# Altium PCB PCB1.PcbDoc (part 1 of 2)
Units mm, origin at the board's own origin, x right, y up, seen from the top; angles counter-clockwise.
Board outline 19 x 71.98 mm, 2 copper layers (Top Layer, Bottom Layer), stack 0.792 mm thick; 87 components, 51 nets, 279 pads, 160 vias.
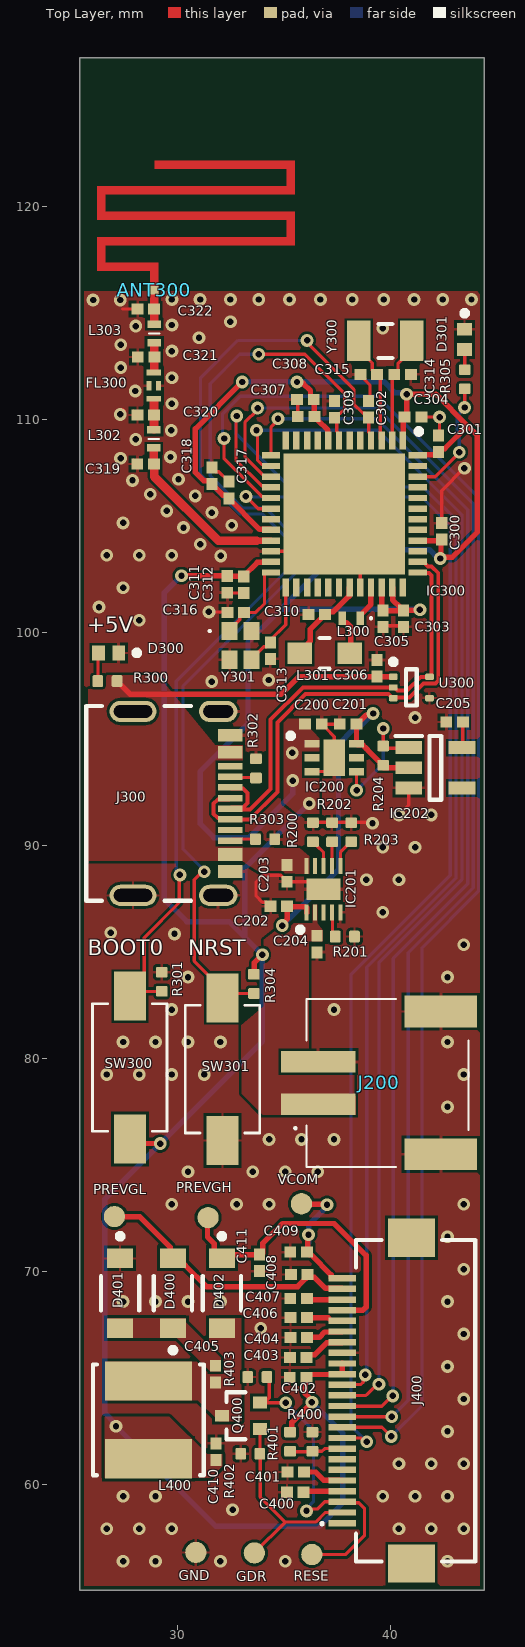
[diagram p0: Top Layer view]
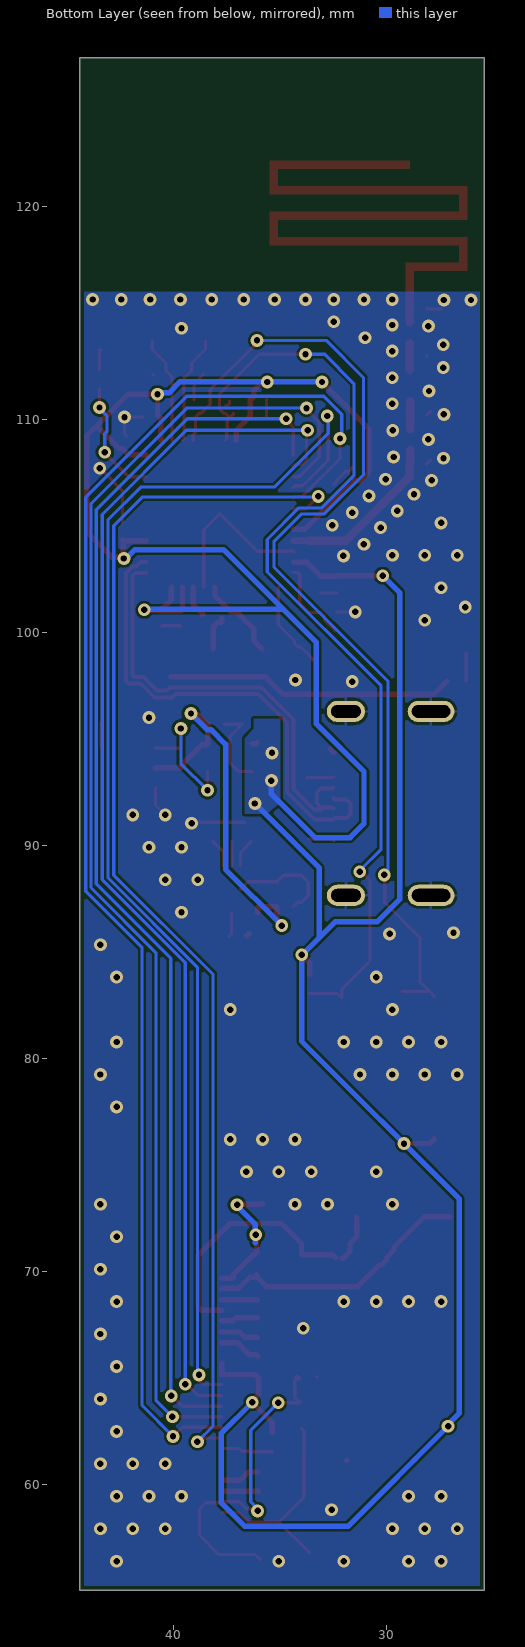
[diagram p1: Bottom Layer view, seen from below]
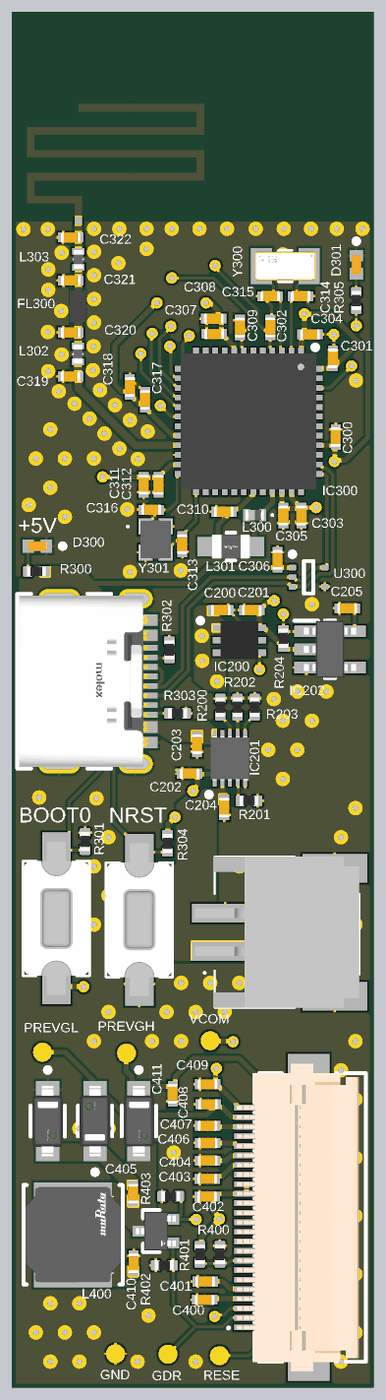
[diagram p2: 3D render of the assembled board from above, using the file's embedded part models]

## Layer stack, top to bottom
Top Solder: solder mask 0.0178, Solder Resist, Dk 4.4
Top Layer: signal copper 0.0406
Dielectric 1: dielectric 0.7112, FR-4, Dk 4.4
Bottom Layer: signal copper 0.0406
Bottom Solder: solder mask 0.0178, Solder Resist, Dk 4.4

## Board outline
25.4,55.025 25.4,127 44.4,127 44.4,116 44.4,55.025 44.375,55.025

## Design rules (kind name [scope] priority, off if disabled: settings)
BoardOutlineClearance [All] p1: gap=0.2 ignorepadtopadclearanceinfootprint=FALSE
Clearance "Stitching GND" [IsStitchingVia and InNet('GND') vs OnLayer('Top Solder')] p1: gap=0.127 ignorepadtopadclearanceinfootprint=FALSE
Clearance [All] p2: gap=0.127 ignorepadtopadclearanceinfootprint=TRUE
ComponentClearance [All] p1: gap=0.127 collisioncheckmode=3 verticalgap=0.127 showdistances=TRUE
DiffPairsRouting [All] p1: maxlimit=0.127 minlimit=0.127 mostfreqgap=0.127 toplayer_minwidth=0.187 toplayer_maxwidth=0.187 toplayer_prefwidth=0.187 bottomlayer_minwidth=0.187 bottomlayer_maxwidth=0.187 bottomlayer_prefwidth=0.187 impedanceprofiledriven=TRUE impedanceprofileid={A50F6D99-8F6A-45D2-AA71-C701F7DE1C7E} impedanceprofilevalue=90.000000 maxuncoupledlength=12.7
Height [All] p1: minheight=0 maxheight=1816.048 prefheight=12.7
HoleSize [All] p1: absolutevalues=TRUE maxlimit=6.3 minlimit=0.3 maxpercent=80.000 minpercent=20.000
HoleToHoleClearance [All] p1: gap=0.25 allowstackedmicrovias=FALSE
MinimumAnnularRing [All] p1: minimumring=0.076
MinimumSolderMaskSliver [All] p1: minsoldermaskwidth=0
PlaneClearance [All] p1: clearance=0.127
PlaneConnect PlaneConnectPOWER [InNetClass('POWER')] p1: planeconnectstyle=Direct reliefexpansion=0.3 reliefentries=4 reliefconductorwidth=0.127 reliefairgap=0.127
PlaneConnect [All] p2: pad.planeconnectstyle=Relief pad.reliefexpansion=0.3 pad.reliefentries=4 pad.reliefconductorwidth=0.127 pad.reliefairgap=0.127 via.planeconnectstyle=Direct via.reliefexpansion=0.3 via.reliefentries=4 via.reliefconductorwidth=0.127 via.reliefairgap=0.127
PolygonConnect PolygonConnectNetClassPower [InNetClass('POWER')] p1: thpad.connectstyle=Relief thpad.reliefconductorwidth=0.127 thpad.reliefentries=4 thpad.polygonreliefangle="90 Angle" thpad.airgapwidth=0.127 smdpad.connectstyle=Direct smdpad.reliefconductorwidth=0.127 smdpad.reliefentries=4 smdpad.polygonreliefangle="90 Angle" smdpad.airgapwidth=0.127 via.connectstyle=Direct via.reliefconductorwidth=0.127 via.reliefentries=4 via.polygonreliefangle="90 Angle" via.airgapwidth=0.127
PolygonConnect PolygonConnectBoost1 [InNet('NetC405_2')] p2: connectstyle=Direct reliefconductorwidth=0.254 reliefentries=4 polygonreliefangle="90 Angle" airgapwidth=0.254
PolygonConnect PolygonConnectBoost2 [InNet('NetC405_1')] p3: connectstyle=Direct reliefconductorwidth=0.254 reliefentries=4 polygonreliefangle="90 Angle" airgapwidth=0.254
PolygonConnect [All] p4: thpad.connectstyle=Relief thpad.reliefconductorwidth=0.127 thpad.reliefentries=4 thpad.polygonreliefangle="90 Angle" thpad.airgapwidth=0.127 smdpad.connectstyle=Relief smdpad.reliefconductorwidth=0.127 smdpad.reliefentries=4 smdpad.polygonreliefangle="90 Angle" smdpad.airgapwidth=0.127 via.connectstyle=Direct via.reliefconductorwidth=0.127 via.reliefentries=4 via.polygonreliefangle="90 Angle" via.airgapwidth=0.127
RoutingVias [All] p1: holewidth=0.3 width=0.6 viastyle="Through Hole" minholewidth=0.3 minwidth=0.6 maxholewidth=0.6 maxwidth=6.6
SilkToSilkClearance [All] p1: silktosilkclearance=0
SilkToSolderMaskClearance [IsPad] p1: minsilkscreentomaskgap=0.127 clearancetoexposedcopper=TRUE
SolderMaskExpansion [All] p1: expansion=0.075 istentingtop=FALSE
SupplyNets "Schematic Supply Nets_2" [InNet('+5V')] p1: voltage=0.000
SupplyNets "Schematic Supply Nets_1" [InNet('+3V3')] p2: voltage=0.000
SupplyNets "Schematic Supply Nets" [InNet('GND')] p3: voltage=0.000
Width [All] p1: maxlimit=0.762 minlimit=0.127 preferedwidth=0.152 minimp=50.000000 maximp=50.000000 favimp=50.000000
20 further rules are at their usual default settings.

## Classes and differential pairs
net class POWER: +3V3 +5V BAT+
component class POWER: 3 C200 C201 C202 C203 C204 C205 IC200 IC201 IC202 J200 R200 R201 R202 R203 R204
component class MCU: ANT300 C300 C301 C302 C303 C304 C305 C306 C307 C308 C309 C310 C311 C312 C313 C314 C315 C316 C317 C318 C319 C320 C321 C322 D300 D301 FL300 IC300 J300 L300 L301 L302 L303 R300 R301 R302 R303 R304 R305 SW300 SW301 U300 Y300 Y301
component class DISPLAY: C400 C401 C402 C403 C404 C405 C406 C407 C408 C409 C410 C411 D400 D401 D402 GDR GND J400 L400 PREVGH PREVGL Q400 R400 R401 R402 R403 RESE VCOM
differential pair USB_D: +USB_D_P -USB_D_N

## Components (designator, comment, footprint, x,y, rotation, side; value= is the part's Value field where it differs from the comment)
ANT300 "MEANDER_ANTENNA" MEANDER_ANTENNA 28.7,115.875 r0 top locked
C200 "Capacitor 1 uF +/- 10% 6.3 V 0402" CAPC1005X55X25LL05T10 36.375,95.7 r180 top value=1uF
C201 "Capacitor 1 uF +/- 10% 6.3 V 0402" CAPC1005X55X25LL05T10 38,95.7 r0 top value=1uF
C202 "Capacitor 1 uF +/- 10% 6.3 V 0402" CAPC1005X55X25LL05T10 34.74,87.15 r0 top value=10uF
C203 "Capacitor 1 uF +/- 10% 6.3 V 0402" CAPC1005X55X25LL05T10 35.125,88.69 r90 top value=1uF
C204 "Capacitor 1 uF +/- 10% 6.3 V 0402" CAPC1005X55X25LL05T10 36.55,85.375 r90 top value=1uF
C205 "Capacitor 1 uF +/- 10% 6.3 V 0402" CAPC1005X55X25LL05T10 43,95.8 r0 top value=10nF
C300 "Capacitor 1 uF +/- 10% 6.3 V 0402" CAPC1005X55X25LL05T10 42.4,104.76 r270 top value=100nF
C301 "Capacitor 1 uF +/- 10% 6.3 V 0402" CAPC1005X55X25LL05T10 42.25,108.875 r270 top value=100nF
C302 "Capacitor 1 uF +/- 10% 6.3 V 0402" CAPC1005X55X25LL05T10 38.967,110.494 r270 top value=100nF
C303 "Capacitor 1 uF +/- 10% 6.3 V 0402" CAPC1005X55X25LL05T10 40.6,100.65 r90 top value=100nF
C304 "Capacitor 1 uF +/- 10% 6.3 V 0402" CAPC1005X55X25LL05T10 41.05,110.125 r180 top value=100nF
C305 "Capacitor 1 uF +/- 10% 6.3 V 0402" CAPC1005X55X25LL05T10 39.65,100.65 r90 top value=4.7uF
C306 "Capacitor 1 uF +/- 10% 6.3 V 0402" CAPC1005X55X25LL05T10 39.35,98.335 r270 top value=100nF
C307 "Capacitor 1 uF +/- 10% 6.3 V 0402" CAPC1005X55X25LL05T10 36.025,110.15 r0 top value=1uF
C308 "Capacitor 1 uF +/- 10% 6.3 V 0402" CAPC1005X55X25LL05T10 36,110.95 r0 top value=10nF
C309 "Capacitor 1 uF +/- 10% 6.3 V 0402" CAPC1005X55X25LL05T10 37.372,110.484 r270 top value=100nF
C310 "Capacitor 1 uF +/- 10% 6.3 V 0402" CAPC1005X55X25LL05T10 36.525,100.85 r0 top value=4.7uF
C311 "Capacitor 1 uF +/- 10% 6.3 V 0402" CAPC1005X55X25LL05T10 32.325,102.265 r90 top value=100pF
C312 "Capacitor 1 uF +/- 10% 6.3 V 0402" CAPC1005X55X25LL05T10 33.1,102.255 r90 top value=100nF
C313 "Capacitor 1 uF +/- 10% 6.3 V 0402" CAPC1005X55X25LL05T10 34.35,99.15 r90 top value=10pF
C314 "Capacitor 1 uF +/- 10% 6.3 V 0402" CAPC1005X55X25LL05T10 40.56,112.125 r180 top value=18pF
C315 "Capacitor 1 uF +/- 10% 6.3 V 0402" CAPC1005X55X25LL05T10 38.965,112.125 r0 top value=18pF
C316 "Capacitor 1 uF +/- 10% 6.3 V 0402" CAPC1005X55X25LL05T10 32.725,100.95 r0 top value=10pF
C317 "Capacitor 1 uF +/- 10% 6.3 V 0402" CAPC1005X55X25LL05T10 32.4,106.7 r270 top value=100nF
C318 "Capacitor 1 uF +/- 10% 6.3 V 0402" CAPC1005X55X25LL05T10 31.6,107.375 r270 top value=4.7uF
C319 "Capacitor 1 uF +/- 10% 6.3 V 0402" CAPC1005X55X25LL05T10 28.49,107.925 r0 top value=0.8pF
C320 "Capacitor 1 uF +/- 10% 6.3 V 0402" CAPC1005X55X25LL05T10 28.5,110.225 r0 top value=0.3pF
C321 "Capacitor 1 uF +/- 10% 6.3 V 0402" CAPC1005X55X25LL05T10 28.51,112.95 r0 top value=DNP/TBD
C322 "Capacitor 1 uF +/- 10% 6.3 V 0402" CAPC1005X55X25LL05T10 28.5,115.2 r0 top value=DNP/TBD
C400 "Capacitor 1 uF +/- 10% 6.3 V 0402" CAPC1005X55X25LL05T10 35.525,59.625 r180 top value=4.7uF/25V
C401 "Capacitor 1 uF +/- 10% 6.3 V 0402" CAPC1005X55X25LL05T10 35.55,60.575 r180 top value=4.7uF/25V
C402 "Capacitor 1 uF +/- 10% 6.3 V 0402" CAPC1005X55X25LL05T10 35.65,65.025 r0 top value=1uF/50V
C403 "Capacitor 1 uF +/- 10% 6.3 V 0402" CAPC1005X55X25LL05T10 35.66,65.95 r0 top value=1uF/50V
C404 "Capacitor 1 uF +/- 10% 6.3 V 0402" CAPC1005X55X25LL05T10 35.685,66.9 r0 top value=1uF/50V
C405 "Capacitor 1 uF +/- 10% 6.3 V 0402" CAPC1005X55X25LL05T10 31.772,65.176 r90 top value=4.7uF/25V
C406 "Capacitor 1 uF +/- 10% 6.3 V 0402" CAPC1005X55X25LL05T10 35.685,67.825 r0 top value=4.7uF/25V
C407 "Capacitor 1 uF +/- 10% 6.3 V 0402" CAPC1005X55X25LL05T10 35.675,68.725 r0 top value=4.7uF/25V
C408 "Capacitor 1 uF +/- 10% 6.3 V 0402" CAPC1005X55X25LL05T10 35.7,69.85 r0 top value=4.7uF/25V
C409 "Capacitor 1 uF +/- 10% 6.3 V 0402" CAPC1005X55X25LL05T10 35.675,70.9 r0 top value=1uF/50V
C410 "Capacitor 1 uF +/- 10% 6.3 V 0402" CAPC1005X55X25LL05T10 31.804,61.533 r270 top value=4.7uF/25V
C411 "Capacitor 1 uF +/- 10% 6.3 V 0402" CAPC1005X55X25LL05T10 33.85,70.4 r90 top value=4.7uF/25V
D300 "LED" FP-VLMO1500-GS08-MFG 26.75,99.05 r180 top
D301 "LED" FP-VLMO1500-GS08-MFG 43.475,113.775 r270 top
D400 "MBR0530" FP-425-04-MFG 29.775,68.975 r90 top
D401 "MBR0530" FP-425-04-MFG 27.293,68.971 r270 top
D402 "MBR0530" FP-425-04-MFG 32.075,68.975 r270 top
FL300 "DLF162500LT-5028A1" DLF162500LT5028A1 28.873,111.6 r90 top
GDR "TPAD10R" TEST_POINT 33.6,56.775 r90 top
GND "TPAD10R" TEST_POINT 30.85,56.8 r90 top
IC200 "TPS74533PQWDRVRQ1" SON65P200X200X80-7N 37.35,94.125 r0 top
IC201 "BQ25185DLHR" SON40P220X200X80-11N 36.85,87.95 r90 top
IC202 "NCV303LSN34T1G" SOT95P275X110-5N 42.1,93.65 r0 top
IC300 "STM32WB35CCU6AXXX" QFN50P700X700X65-49N-D 37.825,105.575 r270 top
J200 "S2B-PH-SM4-TB_LF__SN_" S2BPHSM4TBLFSN 39.85,78.85 r270 top locked
J300 "217179-0001" FP-2171790001-MFG 29.05,91.98 r270 top locked
J400 "FH12-24S-0.5SH_55_" FH12-24S-0.5SH(55) 38.375,63.925 r90 top locked
L300 "10nH" FP-LQG15WH_02-MFG 38.15,100.675 r180 top
L301 "10uH" FP-LQM21FN_70-MFG 36.898,99.027 r180 top
L302 "2.7nH" LQG15WH0N7B02D 28.875,109.1 r90 top
L303 "DNP/TBD" LQG15WH0N7B02D 28.9,114.05 r90 top
L400 "10uH/1.2A" FP-LQH5BPB_T0-MFG 28.625,63.025 r90 top
PREVGH "TPAD10R" TEST_POINT 31.425,72.525 r90 top (schematic designator PREVGH400)
PREVGL "TPAD10R" TEST_POINT 27.025,72.575 r90 top (schematic designator PREVGL400)
Q400 "SI1308EDL" FP-5549-MFG 32.968,63.216 r180 top
R200 "100R2F" RESC0402(1005)_L 36.35,90.625 r270 top value=600Ω
R201 "100R2F" RESC0402(1005)_L 37.85,85.725 r180 top value=10kΩ
R202 "100R2F" RESC0402(1005)_L 37.25,90.625 r270 top value=13kΩ
R203 "100R2F" RESC0402(1005)_L 38.15,90.625 r270 top value=10kΩ
R204 "100R2F" RESC0402(1005)_L 39.65,94.225 r90 top value=470kΩ
R300 "100R2F" RESC0402(1005)_L 26.7,97.725 r0 top value=500Ω
R301 "100R2F" RESC0402(1005)_L 29.25,83.6 r90 top value=10kΩ
R302 "100R2F" RESC0402(1005)_L 33.675,93.625 r90 top value=5.1kΩ
R303 "100R2F" RESC0402(1005)_L 34.1,90.3 r0 top value=5.1kΩ
R304 "100R2F" RESC0402(1005)_L 33.575,83.5 r270 top value=10kΩ
R305 "100R2F" RESC0402(1005)_L 43.475,111.9 r90 top value=330Ω
R400 "100R2F" RESC0402(1005)_L 36.325,62 r270 top value=3Ω
R401 "100R2F" RESC0402(1005)_L 35.275,62 r270 top value=10kΩ
R402 "100R2F" RESC0402(1005)_L 33.41,61.431 r180 top value=10kΩ
R403 "100R2F" RESC0402(1005)_L 33.738,65.038 r180 top value=0.47Ω
RESE "TPAD10R" TEST_POINT 36.3,56.7 r90 top
SW300 "434111050826" 434111050826 27.75,79.575 r90 top
SW301 "434111050826" 434111050826 32.1,79.5 r90 top
U300 "TPD2E001DRLR" DRL0005A_L 40.975,97.425 r0 top
VCOM "TPAD10R" TEST_POINT 35.813,73.175 r90 top
Y300 "ECS-.327-12.5-34B-TR" FP-ECX-31B-MFG 39.75,113.7 r180 top
Y301 "ECS-320-8-37B-CKY-TR" ECS320837BCKYTR 32.95,99.4 r270 top

## Footprints (in the part's own frame and the unit in brackets; to place one, negate y for a bottom-side part, rotate by r counter-clockwise, add the part's x,y. Pads: shape width x height; smd on the part's side, far side on the other; paste and mask are expansions set on the pad)
434111050826 [mm] "SMD Tact Switch, body 6x3.5mm"
  rect 2.3x1.5 smd: 1(-3.35,0) 2(3.35,0)
  silkscreen extent -3,-1.75 3,1.75, body extent -4,-1.75 4,1.75, height 5
CAPC1005X55X25LL05T10 [mm] "Chip Capacitor, 2-Leads, Body 1.05x0.55mm, IPC High Density"
  rect 0.56x0.52 smd: 1(-0.39,0) 2(0.39,0)
  body extent -0.53,-0.28 0.53,0.28, height 0.55
DLF162500LT5028A1 [mm]
  rect 0.275x0.7 smd: 1(-0.612,0) 3(0.613,0)
  rect 0.45x0.245 smd: 2(0,-0.227) 4(0,0.227)
  body extent -0.83,-0.42 0.83,0.42, height 0.26
DRL0005A_L [mm] "SOT23, 5-Leads, Body 1.7x1.3mm, Pitch 0.5mm, IPC High Density"
  rrect33% 0.4x0.3 smd: 1(-0.85,0.5) 2(-0.85,0) 3(-0.85,-0.5) 4(0.85,-0.5) 5(0.85,0.5)
  silkscreen extent -0.97,-0.85 0.25,1.32, body extent -0.65,-0.85 0.65,0.85, height 0.6
ECS320837BCKYTR [mm]
  rect 0.85x0.75 smd: 1(-0.675,-0.525) 2(0.675,-0.525) 3(0.675,0.525) 4(-0.675,0.525)
  silkscreen extent -0.72,-1.5 -0.63,-1.4, body extent -1.02,-0.82 1.02,0.82, height 0.6
FH12-24S-0.5SH(55) [mm]
  rect 0.3x1.3 smd: 1(-5.75,0.65) 2(-5.25,0.65) 3(-4.75,0.65) 4(-4.25,0.65) 5(-3.75,0.65) 6(-3.25,0.65) 7(-2.75,0.65) 8(-2.25,0.65) 9(-1.75,0.65) 10(-1.25,0.65) 11(-0.75,0.65) 12(-0.25,0.65) 13(0.25,0.65) 14(0.75,0.65) 15(1.25,0.65) 16(1.75,0.65) 17(2.25,0.65) 18(2.75,0.65) 19(3.25,0.65) 20(3.75,0.65) 21(4.25,0.65) 22(4.75,0.65) 23(5.25,0.65) 24(5.75,0.65)
  rect 1.8x2.2 smd: 25(-7.65,-2.6) 26(7.65,-2.6)
  silkscreen extent -7.55,-5.6 7.55,1.62, body extent -8.05,-5.25 8.05,1.15, height 2.1
FP-425-04-MFG [mil]
  rect 36x48 smd paste+0 mask+0: 1(-64.5,0) 2(64.5,0)
  silkscreen extent -110,-35 32,35, body extent -86,-39 86,39, height 10
FP-5549-MFG [mm]
  rect 0.648x0.559 smd paste+0 mask+0: 1(-0.895,0.623) 2(-0.895,-0.623) 3(0.895,0)
  silkscreen extent -0.2,-1.1 0.67,1.1, body extent -1.32,-1.2 1.32,1.2, height 0.25
FP-2171790001-MFG [mm]
  rrect100% 1x1.8 hole 1.4 slot 0.6 at 0 deg paste-2539.97 mask+0: 1(-4.32,2.85) 2(4.32,2.85)
  rrect100% 1x2.2 hole 1.8 slot 0.6 at 0 deg paste-2539.97 mask+0: 3(-4.32,-1.15) 4(4.32,-1.15)
  rect 0.6x1.15 smd paste+0 mask+0: A1-B12(-3.2,3.425) A4-B9(-2.4,3.425) B1-A12(3.2,3.425) B4-A9(2.4,3.425)
  rect 0.3x1.15 smd paste+0 mask+0: A5(-1.25,3.425) A6(-0.25,3.425) A7(0.25,3.425) A8(1.25,3.425) B5(1.75,3.425) B6(0.75,3.425) B7(-0.75,3.425) B8(-1.75,3.425)
  silkscreen extent -4.57,-3.35 4.57,1.58, body extent -4.92,-3.45 4.92,4.1, height 0.25
FP-ECX-31B-MFG [mm]
  rect 1.1x1.9 smd paste+0 mask+0: 1(-1.25,0) 2(1.25,0)
  silkscreen extent -0.33,-0.8 0.33,0.8, body extent -1.9,-1.05 1.9,1.05, height 0.25
FP-LQG15WH_02-MFG [mm]
  rect 0.35x0.65 smd paste+0 mask+0: 1(-0.425,0) 2(0.425,0)
  silkscreen extent -0.97,-0.05 -0.88,0.05, body extent -0.7,-0.43 0.7,0.43, height 0.25
FP-LQH5BPB_T0-MFG [mm]
  rect 1.85x4.1 smd paste+0 mask+0: 1(-1.825,0) 2(1.825,0)
  silkscreen extent -2.6,-2.6 2.6,2.6, body extent -2.85,-2.7 2.85,2.7, height 0.25
FP-LQM21FN_70-MFG [mm]
  rect 1.15x1 smd paste+0 mask+0: 1(-1.175,0) 2(1.175,0)
  silkscreen extent -0.23,-0.72 0.23,0.72, body extent -1.85,-0.82 1.85,0.82, height 0.25
FP-VLMO1500-GS08-MFG [mm]
  rect 0.6x0.7 smd paste+0 mask+0: 1(-0.475,0) 2(0.475,0)
  silkscreen extent -1.45,-0.12 -1.2,0.12, body extent -0.87,-0.45 0.87,0.45, height 0.25
LQG15WH0N7B02D [mm]
  rect 0.35x0.65 smd: 1(-0.425,0) 2(0.425,0)
  silkscreen extent 0,-0.25 0,0.25, body extent -0.5,-0.25 0.5,0.25, height 0.55
MEANDER_ANTENNA [mm] "2.4GHz meander antenna"
  rect 0.4x0.4 smd: 0(0.2,0.2)
  Top Layer region: 0.2,5.9 6.8,5.9 6.8,6.3 0.2,6.3
  Top Layer region: 6.4,4.7 6.8,4.7 6.8,6.3 6.4,6.3
  Top Layer region: -2.5,4.7 6.8,4.7 6.8,5.1 -2.5,5.1
  Top Layer region: -2.5,3.5 -2.1,3.5 -2.1,5.1 -2.5,5.1
  Top Layer region: -2.5,3.5 6.8,3.5 6.8,3.9 -2.5,3.9
  Top Layer region: 6.4,2.3 6.8,2.3 6.8,3.9 6.4,3.9
  Top Layer region: -2.5,2.3 6.8,2.3 6.8,2.7 -2.5,2.7
  Top Layer region: -2.5,1.1 -2.1,1.1 -2.1,2.7 -2.5,2.7
  Top Layer region: -2.5,1.1 0.4,1.1 0.4,1.5 -2.5,1.5
  Top Layer region: 0,0 0.4,0 0.4,1.5 0,1.5
QFN50P700X700X65-49N-D [mm]
  rect 0.85x0.3 smd: 1(-3.45,2.75) 2(-3.45,2.25) 3(-3.45,1.75) 4(-3.45,1.25) 5(-3.45,0.75) 6(-3.45,0.25) 7(-3.45,-0.25) 8(-3.45,-0.75) 9(-3.45,-1.25) 10(-3.45,-1.75) 11(-3.45,-2.25) 12(-3.45,-2.75) 25(3.45,-2.75) 26(3.45,-2.25) 27(3.45,-1.75) 28(3.45,-1.25) 29(3.45,-0.75) 30(3.45,-0.25) 31(3.45,0.25) 32(3.45,0.75) 33(3.45,1.25) 34(3.45,1.75) 35(3.45,2.25) 36(3.45,2.75)
  rect 0.3x0.85 smd: 13(-2.75,-3.45) 14(-2.25,-3.45) 15(-1.75,-3.45) 16(-1.25,-3.45) 17(-0.75,-3.45) 18(-0.25,-3.45) 19(0.25,-3.45) 20(0.75,-3.45) 21(1.25,-3.45) 22(1.75,-3.45) 23(2.25,-3.45) 24(2.75,-3.45) 37(2.75,3.45) 38(2.25,3.45) 39(1.75,3.45) 40(1.25,3.45) 41(0.75,3.45) 42(0.25,3.45) 43(-0.25,3.45) 44(-0.75,3.45) 45(-1.25,3.45) 46(-1.75,3.45) 47(-2.25,3.45) 48(-2.75,3.45)
  rect 5.7x5.7 smd: 49(0,0)
  silkscreen extent -4,3.38 -3.75,3.63, body extent -3.56,-3.56 3.56,3.56, height 0.61
RESC0402(1005)_L [mm] "Chip Resistor, Body 1.0x0.5mm, IPC High Density"
  rrect25% 0.5x0.55 smd: 1(-0.45,0) 2(0.45,0)
  body extent -0.5,-0.25 0.5,0.25, height 0.3
S2BPHSM4TBLFSN [mm]
  rect 1x3.5 smd: 1(1,-3.25) 2(-1,-3.25)
  rect 1.5x3.4 smd: MP1(3.35,2.5) MP2(-3.35,2.5)
  silkscreen extent -3.95,-4.37 3.95,3.8, body extent -3.95,-4.83 3.95,3.77, height 5.6
SON40P220X200X80-11N [mm]
  rect 0.75x0.2 smd: 1(-1.1,0.8) 2(-1.1,0.4) 3(-1.1,0) 4(-1.1,-0.4) 5(-1.1,-0.8) 6(1.1,-0.8) 7(1.1,-0.4) 8(1.1,0) 9(1.1,0.4) 10(1.1,0.8)
  rect 1x1.6 smd: 11(0,0)
  silkscreen extent -2.02,0.97 -1.78,1.22, body extent -1.15,-1 1.15,1, height 0.8
SON65P200X200X80-7N [mm]
  rect 0.7x0.35 smd: 1(-1.05,0.65) 2(-1.05,0) 3(-1.05,-0.65) 4(1.05,-0.65) 5(1.05,0) 6(1.05,0.65)
  rect 1x1.7 smd: 7(0,0)
  silkscreen extent -2.17,0.9 -1.93,1.15, body extent -1,-1 1,1, height 0.77
SOT95P275X110-5N [mm]
  rect 1.25x0.6 smd: 1(-1.25,0.95) 2(-1.25,0) 3(-1.25,-0.95) 4(1.25,-0.95) 5(1.25,0.95)
  silkscreen extent -1.88,-1.5 0.28,1.5, body extent -1.38,-1.5 1.38,1.5, height 1.1
TEST_POINT [mm]
  round 1 smd paste-1: 1(0,0)

## Part data
ANT300: "2.4GHz meander antenna", ComponentLink1Description="ST Guidelines", ComponentLink1URL=https://www.st.com/resource/en/application_note/an5129-guidelines-for-meander-design-using-lowcost-pcb-antennae-with-24-ghz-radio-for-stm32wbwb0-mcus-stmicroelectronics.pdf
C200 C201 C202 C203 C204 C205 C300 C301 C302 C303 C304 C305 C306 C307 C308 C309 C310 C311 C312 C313 C314 C315 C316 C317 C318 C319 C320 C321 C322 C400 C401 C402 C403 C404 C405 C406 C407 C408 C409 C410 C411: library part CMP-001-00008-6, "Chip Capacitor, 1 uF, +/- 10%, 6.3 V, 0402 (1005 Metric)", Capacitor Type=Ceramic, Case/Package=0402, Max Operating Temperature=85°C, Min Operating Temperature=-55°C, Tolerance=10%, Voltage Rating=6.3V, Mounting Technology=SM, Pins=2, RoHS Compliant=True
D300 D301: library part CMP-00030-24098164-1, "VLMO1500-GS08 LED Uni-Color Soft Orange 611nm 2-Pin Chip 0402(1006Metric) T/R", Ambient Temperature Range High=85°C, Case Code (Imperial)=0402, Case Code (Metric)=1005, Color=Orange, Forward Current=20mA, Forward Voltage=2V, Min Operating Temperature=-30°C, Power Dissipation=75mW, Reverse Voltage=5V, Case/Package=0402, Dominant Wavelength=605nm, Height=350µm, Illumination Color=Orange, Lead Free="Lead Free", Length=1mm, Lens Style="Rectangular, Square", Luminous Intensity=90mcd, Max Operating Temperature=85°C, Mount="Surface Mount", NexarPartId=24098164, Number of LEDs=1, Number of Pins=2, Packaging="Cut Tape", Power Rating=75mW, Radiation Hardening=No, RoHS=Compliant, Schedule B="8541402000, 8541402000", Test Current=20mA, Viewing Angle=130°, Wavelength=605nm, Width=500µm
D400 D401 D402: library part CMP-2000-05113-2, "DIODE SCHOTTKY 30V 500MA SOD123", Average Rectified Current=500mA, Forward Voltage=430mV, Max Forward Surge Current (Ifsm)=5.5A, Max Operating Temperature=150°C, Max Repetitive Reverse Voltage (Vrrm)=30V, Max Reverse Leakage Current=130uA, Min Operating Temperature=-65°C, Package Quantity=1, ComponentLink1Description=DigiKey, ComponentLink1URL=https://www.digikey.ca/en/products/detail/smc-diode-solutions/MBR0530/16692306, Contact Plating=Tin, Current Rating=500mA, Element Configuration=Single, Forward Current=500mA, Height=1.03mm, Lead Free="Lead Free", Length=2.7mm, Max Reverse Voltage (DC)=30V, Max Surge Current=5.5A, Mount="Surface Mount", Number of Pins=2, Output Current=500mA, Packaging="Tape and Reel", Peak Non-Repetitive Surge Current=5.5A, Peak Reverse Current=130uA, Polarity=Standard, Radiation Hardening=No, REACH SVHC="No SVHC", Voltage Rating (DC)=30V, Weight=0.03g, Width=1.6mm
FL300: "Filter", Manufacturer_Name=TDK, Mouser Part Number=810-DLF16250LT5028A1, Arrow Part Number=DLF162500LT-5028A1, Arrow Price/Stock=https://www.arrow.com/en/products/dlf162500lt-5028a1/tdk?utm_currency=USD&region=nac, Datasheet Link=https://product.tdk.com/system/files/dam/doc/product/rf/rf/filter/catalog/rf_lpf_dlf162500lt-5028a1_en.pdf, Height=0.4mm, Manufacturer_Part_Number=DLF162500LT-5028A1, Mouser Price/Stock=https://www.mouser.co.uk/ProductDetail/TDK/DLF162500LT-5028A1?qs=U%2FZX79kHR%2FlwIbAISCs3qA%3D%3D
GDR GND PREVGH PREVGL RESE VCOM: library part TEST_POINT, "Testpont Pad 10R"
IC200: "Integrated Circuit", Manufacturer_Name="Texas Instruments", Mouser Part Number=595-PS74533PQWDRVRQ1, Datasheet Link=https://www.ti.com/lit/gpn/TPS745-Q1, Height=0.8mm, Manufacturer_Part_Number=TPS74533PQWDRVRQ1, Mouser Price/Stock=https://www.mouser.co.uk/ProductDetail/Texas-Instruments/TPS74533PQWDRVRQ1?qs=%252B6g0mu59x7KMjoigNjBCww%3D%3D
IC201: "Integrated Circuit", Manufacturer_Name="Texas Instruments", Mouser Part Number=595-BQ25185DLHR, Datasheet Link=https://www.ti.com/lit/ds/symlink/bq25185.pdf?ts=1706857561339&ref_url=https%253A%252F%252Fwww.ti.com%252Fproduct%252FBQ25185, Height=0.8mm, Manufacturer_Part_Number=BQ25185DLHR, Mouser Price/Stock=https://www.mouser.co.uk/ProductDetail/Texas-Instruments/BQ25185DLHR?qs=Z%252BL2brAPG1IbO%2FV3RqsaPw%3D%3D
IC202: "Integrated Circuit", Manufacturer_Name=onsemi, Mouser Part Number=863-NCV303LSN34T1G, Arrow Part Number=NCV303LSN34T1G, Arrow Price/Stock=https://www.arrow.com/en/products/ncv303lsn34t1g/on-semiconductor.html?utm_currency=USD&region=europe, Datasheet Link=https://www.onsemi.com/pub/Collateral/NCP302-D.PDF, Height=1.1mm, Manufacturer_Part_Number=NCV303LSN34T1G, Mouser Price/Stock=https://www.mouser.com/Search/Refine.aspx?Keyword=863-NCV303LSN34T1G
IC300: "Integrated Circuit", Manufacturer_Name=STMicroelectronics, ComponentLink1Description=DigiKey, ComponentLink1URL=https://www.digikey.ca/en/products/detail/stmicroelectronics/STM32WB35CCU6A/13282469, Datasheet Link=https://www.st.com/resource/en/datasheet/stm32wb35cc.pdf, Height=0.65mm, Manufacturer_Part_Number=STM32WB35CCU6AXXX
J200: "Connector", Arrow Part Number=S2B-PH-SM4-TB(LF)(SN), Manufacturer_Name="JST (JAPAN SOLDERLESS TERMINALS)", Mouser Part Number=N/A, Arrow Price/Stock=https://www.arrow.com/en/products/s2b-ph-sm4-tb-lf-sn/jst-manufacturing?utm_currency=USD&region=europe, ComponentLink1Description=DigiKey, ComponentLink1URL=https://www.digikey.ca/en/products/detail/jst-sales-america-inc/S2B-PH-SM4-TB/926655, ComponentLink2Description=Battery, ComponentLink2URL=https://www.amazon.ca/4200mah-Rechargeable-Lithium-Replacement-Electronic/dp/B091Y3TW9F?sr=8-6, Datasheet Link=https://www.jst-mfg.com/product/pdf/eng/ePH.pdf, Height=6.6mm, Manufacturer_Part_Number=S2B-PH-SM4-TB(LF)(SN), Mouser Price/Stock=https://www.mouser.co.uk/ProductDetail/JST-Commercial/S2B-PH-SM4-TBLFSN?qs=QpmGXVUTftEA9IU90i0xlg%3D%3D
J300: library part CMP-04767-000028-2, "CONN RCP USB2.0 TYP C 24P SMD RA", Current Rating=1.25A, Max Operating Temperature=85°C, Min Operating Temperature=-40°C, Voltage Rating=30V, Contact Material="Gold, Nickel", Gender=Receptacle, Height=3.36mm, NexarPartId=117190526, Number of Contacts=16, USB Standard="USB 2.0"
J400: "Connector", Arrow Part Number=FH12-24S-0.5SH(55), Manufacturer_Name=Hirose, Mouser Part Number=798-FH12-24S-0.5SH55, Arrow Price/Stock=https://www.arrow.com/en/products/fh12-24s-0-5sh-55/hirose-electric.html?utm_currency=USD&region=asia, Datasheet Link=https://datasheet.datasheetarchive.com/originals/distributors/SFDatasheet-1/sf-00023459.pdf, Manufacturer_Part_Number=FH12-24S-0.5SH(55), Mouser Price/Stock=https://www.mouser.co.uk/ProductDetail/Hirose-Connector/FH12-24S-0.5SH55?qs=Ux3WWAnHpjDGmuhYLgxkoQ%3D%3D
L300: library part CMP-06042-005237-1, "Multilayer type Inductor for Automotive 10nH ±5% 0.19Ω 500mA 0402", Case Code (Imperial)=0402, Case Code (Metric)=1005, Current Rating=500mA, DC Resistance (DCR)=190mR, Max Operating Temperature=125°C, Min Operating Temperature=-55°C, Ratings=AEC-Q200, Self Resonant Frequency=3.3GHz, Test Frequency=100MHz, Tolerance=5%, Case/Package=0402, Core Material=Air, Inductance=10nH, Mount="Surface Mount", Packaging="Cut Tape", Shielding=Unshielded
L301: library part CMP-2000-06587-2, "FIXED IND 10UH 100MA 780MOHM SMD", Case Code (Imperial)=0805, Case Code (Metric)=2012, Current Rating=100mA, DC Resistance (DCR)=780mR, Max Operating Temperature=125°C, Min Operating Temperature=-55°C, Package Quantity=3000, Self Resonant Frequency=15MHz, Test Frequency=1MHz, Tolerance=20%, Case/Package=0805, Core Material=Ferrite, DC Current=100mA, Depth=1.45mm, Height=1.45mm, Height - Seated (Max)=0.057inch, Inductance=10uH, Lead Free="Lead Free", Length=2.2mm, Max DC Current=100mA, Military Standard=Not, Mount="Surface Mount", Packaging="Tape and Reel", Radiation Hardening=No, Rated Current-Max=100mA, RoHS Compliant=Yes, Saturation Current=100mA, Series=LQM21F_70, Shielding=Shielded, Termination=SMD/SMT, Width=0.049inch
L302 L303: library part LQG15HS2N7S02D, "Inductor", Manufacturer_Name="Murata Electronics", Mouser Part Number=81-LQG15HS2N7S02D, Arrow Part Number=LQG15HS2N7S02D, Arrow Price/Stock=https://www.arrow.com/en/products/lqg15hs2n7s02d/murata-manufacturing?utm_currency=USD&region=nac, Datasheet Link=https://search.murata.co.jp/Ceramy/image/img/P02/JELF243B-0010.pdf, Height=0.6mm, Manufacturer_Part_Number=LQG15HS2N7S02D, Mouser Price/Stock=https://www.mouser.co.uk/ProductDetail/Murata-Electronics/LQG15HS2N7S02D?qs=ctz47l0uL1AKrLI74yO5Qw%3D%3D
L400: library part CMP-06042-011567-1, "Wire Wound Ferrite Inductor for Power Lines 10μH ±20% 0.1272Ω 1.60A 2020", Case Code (Imperial)=2220, Case Code (Metric)=5650, Case/Package=2020, Current Rating=1.6A, DC Resistance (DCR)=106mR, Inductance=10uH, Inductance Tolerance=20%, Max DC Current=2A, Max Operating Temperature=125°C, Min Operating Temperature=-40°C, Package Quantity=1, Resistor Type=Wirewound, Self Resonant Frequency=25MHz, Test Frequency=100kHz, ComponentLink1Description=DigiKey, ComponentLink1URL=https://www.digikey.ca/en/products/detail/murata-electronics/LQH5BPN100MT0L/4358089https://www.digikey.ca/en/products/detail/murata-electronics/LQH5BPN100MT0L/4358089, Core Material=Ferrite, DC Current=1.6A, Depth=5.2mm, Height=2mm, Height - Seated (Max)=0.086inch, Lead Free="Lead Free", Length=5mm, Military Standard=Not, Mount="Surface Mount", Packaging="Tape and Reel", REACH SVHC="No SVHC", Shielding=Shielded, Termination=SMD/SMT, Tolerance=20%, Width=5mm
Q400: library part CMP-02550-000099-2, "MOSFET N-CH 30V 1.4A SC-70-3", Case/Package=SOT-323, Continuous Drain Current (ID)=1.5A, Drain to Source Breakdown Voltage=30V, Drain to Source Resistance=132mR, Gate to Source Voltage (Vgs)=12V, Input Capacitance=105pF, Max Operating Temperature=150°C, Max Power Dissipation=500mW, Min Operating Temperature=-55°C, Package Quantity=3000, Power Dissipation=400mW, Threshold Voltage=600mV, ComponentLink1Description=DigiKey, ComponentLink1URL=https://www.digikey.ca/en/products/detail/evvo/SI1308EDL-EV/26221122, Drain to Source Voltage (Vdss)=30V, Drain-source On Resistance-Max=132mR, Element Configuration=Single, Fall Time=8ns, Height=1mm, Lead Free="Lead Free", Length=2.2mm, Mount="Surface Mount", Number of Channels=1, Number of Elements=1, Number of Pins=3, On-State Resistance=132mR, Packaging="Tape and Reel", Polarity=N-CHANNEL, Radiation Hardening=No, Rds On Max=132mR, REACH SVHC="No SVHC", Rise Time=9ns, RoHS Compliant=Yes, Series=TrenchFET®, Turn-Off Delay Time=8ns, Turn-On Delay Time=2ns, Weight=0.004395oz, Width=1.35mm
R200 R201 R202 R203 R204 R300 R301 R302 R303 R304 R305 R400 R401 R402 R403: library part CMP-009-00065-2, "100R 0.063W 1% 0402 (1005 Metric)  SMD", Case/Package=0402, Power=63mW, Tolerance=1%, Mounting Technology=SMT, Pins=2
SW300 SW301: library part CMP-1459-00003-6, "Switch Tactile Spst-no 0.05A 12V", Contact Current Rating=50mA, Contact Resistance=100mΩ, Insulation Resistance=100MΩ, Manufacturer Lifecycle Status=ACTIVE, Max Operating Temperature=85°C, Min Operating Temperature=-40°C, Operating Force=260N, Voltage Rating=12V, Actuator Length=1.5mm, Actuator Material="Liquid Crystal Polymer, Polymer", Contact Material="Stainless Steel, Steel", Contact Plating=Silver, Current Rating=50mA, Height=5mm, Illumination Type="Illuminated, Non-Illuminated", Length=8mm, Lifecycle Status=Production, Mechanical Life=30kcycles, Mount="Surface Mount", Packaging="Tape and Reel", REACH SVHC=No, RoHS=Compliant, Switch Function=Off-Mom, Switch Travel=250µm, Termination=SMD/SMT, Throw Configuration=SPST, YEOL="1 = Estimated lifetime > 10 years"
U300: library part CMP-0326-00048-3, "Low-Capacitance + / - 15 kV ESD-Protection Array for High-Speed Data Interfaces, 2 Channels, -40 to +85 degC, 5-pin SOT (DRL), Green (RoHS & no Sb/Br)", Breakdown Voltage(Min)(V)=11, IO Capacitance(Typ)(pF)=1.5, IO Leakage Current(nA)=1, Manufacturer="Texas Instruments", ComponentLink1Description="Manufacturer URL", ComponentLink1URL=http://www.ti.com/, ComponentLink2Description=Datasheet, ComponentLink2URL=http://www.ti.com/general/docs/lit/getliterature.tsp?genericPartNumber=TPD2E001&fileType=pdf, ComponentLink3Description="URL Link1", ComponentLink3URL=SamplesURL:http://www.ti.com/product/tpd2e001#samples, DatasheetVersion=SLLS684F, Eco-Plan="Green (RoHS & no Sb/Br)", IEC 61000-4-2 Air-Gap(+/- kV)=15, IEC 61000-4-2 Contact(+/- kV)=8, Mounting Technology="Surface Mount", PackageDescription="5-Pin Plastic Small Outline, Flat Lead 0.5 mm Pitch", PackageReference=DRL0005A, PackageVersion="revD, Aug-2007", PartNumber=TPD2E001DRLR, SubFamily="ESD Solution", USB High Speed=TRUE
Y300: library part CMP-40224-000020-1, "CRYSTAL 32.7680KHZ 12.5PF SMD", Case/Package=SMD/SMT, ESR (Equivalent Series Resistance)=70kR, Frequency=32.768kHz, Frequency Tolerance=20ppm, Load Capacitance=12.5pF, Max Operating Temperature=85°C, Min Operating Temperature=-40°C, Package Quantity=3000, Height=0.035inch, Length=0.126inch, Mount="Surface Mount", Number of Pins=2, Packaging="Tape and Reel", Termination=SMD/SMT, Width=0.059inch
Y301: "Crystal or Oscillator", Manufacturer_Name=ECS, Mouser Part Number=520-320-8-37B-CKYT, Arrow Part Number=ECS-320-8-37B-CKY-TR, Arrow Price/Stock=https://www.arrow.com/en/products/ecs-320-8-37b-cky-tr/ecs-international?region=nac, Datasheet Link=https://ecsxtal.com/store/pdf/ECX-1637B.pdf, Height=0.5mm, Manufacturer_Part_Number=ECS-320-8-37B-CKY-TR, Mouser Price/Stock=https://www.mouser.co.uk/ProductDetail/ECS/ECS-320-8-37B-CKY-TR?qs=l7cgNqFNU1jF5E15eCxZkA%3D%3D

## Via types
v1: diameter 0.6, hole 0.3, Top Layer to Bottom Layer, 160 vias

## Nets (pads, with @x,y where several pads share a name; then routed paths per layer and width w, separated by ;. In a path a pad name is that pad's centre, name@x,y a point inside that pad or via, vN(x,y) a via of type N, cw(c..) or ccw(c..) an arc to the next point about the centre after c; other vN are vias at no path point)
+3V3: C200.2 C300.2 C301.2 C303.2 C304.2 C305.2 C307.2 C308.2 C311.2 C312.2 C317.2 C318.2 C402.2 C410.2 IC200.1 IC300.1 IC300.8 IC300.20 IC300.23 IC300.34 IC300.35 IC300.40 IC300.48 J400.15 J400.16 L400.1 R304.1 R401.1 SW300.1 | length 162.4
  Top Layer w0.152: IC300.23@34.301,103.251 34.352,103.302 IC300.23 ; IC300.20@34.352,104.848 IC300.20 ; IC300.1 IC300.1@40.575,109.3
  Top Layer w0.254: SW300.1 27.968,76.007 29.168,76.007 v1(29.175,76) ; L400.1 L400.1@28.7,61.125 ; v1(30.175,102.675) 30.185,102.665 32.315,102.665 C311.2 32.33,102.65 33.095,102.65 C312.2 33.1,102.665 33.737,103.302 IC300.23@34.352,103.302 ; C410.2@31.85,61.125 C410.2@31.874,61.101 ; v1(33.025,111.775) 30.825,109.575 30.825,107.525 31.212,107.138 31.467,107.138 31.6,107.005 C318.2 31.6,106.965 31.733,106.832 31.753,106.832 32.122,106.463 32.267,106.463 32.342,106.388 32.342,106.338 32.352,106.338 33.842,104.848 IC300.20@34.352,104.848 ; R304.1@33.6,83.95 33.593,83.957 33.593,84.493 v1(33.975,84.875) ; R401.1@35.35,62.425 35.357,62.432 35.357,62.907 v1(36.3,63.85) 36.3,63.944 35.992,64.252 35.992,64.977 C402.2 36.171,65.156 37.706,65.156 J400.15 J400.16 ; v1(35.6,111.775) 35.666,111.709 35.891,111.709 36.237,111.363 36.237,111.083 36.37,110.95 C308.2 36.403,110.937 36.403,110.163 C307.2 36.435,110.15 36.568,110.017 36.568,109.997 37.052,109.513 37.052,109.048 IC300.8 ; IC200.1@36.077,94.823 36.125,94.775 IC200.1 ; IC300.34 39.575,101.215 C305.2@39.675,101.115 ; C305.2@39.644,101.022 40.525,101.022 40.64,101.022 40.64,101.042 40.507,101.175 40.467,101.175 40.098,101.544 40.098,102.102 IC300.35 ; IC300.1 40.598,109.048 40.598,110.063 C304.2 40.75,110.215 v1(40.75,111.2) ; C303.2@40.6,101.04 40.615,101.055 41.359,101.055 v1(41.375,101.07) ; v1@40.79,111.2 42.125,111.2 43.612,109.713 ; IC300.40 C300.2@42.235,104.325 ; IC300.48 41.298,108.348 42.113,108.348 42.113,108.368 C301.2@42.24,108.495 ; C301.2 42.25,108.505 42.383,108.638 42.537,108.638 43.612,109.713 ; v1(42.328,103.481) v1@42.364,103.517 ; C300.2 42.364,104.334 v1@42.364,103.517 ; v1@42.364,103.517 42.394,103.547 42.897,103.547 44.073,104.723 44.073,109.252 43.612,109.713
  Bottom Layer w0.254: v1(30.175,102.675) 29.375,101.875 29.375,87.475 30.425,86.425 32.4,86.425 33.15,85.675 ; v1(33.025,111.775) v1(35.6,111.775) 35.615,111.79 39.685,111.79 40.209,111.266 40.684,111.266 v1(40.75,111.2) ; v1(35.4,93.05) 35.4,92.425 33.35,90.375 31.7,90.375 31.05,91.025 31.05,93.475 33.3,95.725 33.3,99.55 34.85,101.1 ; v1(36.175,91.975) 33.15,88.95 33.15,85.675 ; v1(36.3,63.85) 37.75,62.4 37.75,59.125 36.65,58.025 31.8,58.025 v1(27.1,62.725) 27.1,62.819 26.575,63.344 26.575,73.4 33.975,80.8 v1(33.975,84.875) 33.95,84.875 33.15,85.675 ; v1@41.414,101.052 41.367,101.1 34.85,101.1 ; v1(42.328,103.481) 42.234,103.481 41.815,103.9 37.65,103.9 34.85,101.1
  other v1: 35.375,94.35
+5V: C203.2 C306.2 IC201.10 J300.A4-B9 J300.B4-A9 R300.2 U300.1 | length 13.8
  Top Layer w0.254: R300.2 27.775,97.1 34.85,97.1 35.675,97.925 U300.1 ; J300.A4-B9 J300.A4-B9@32.648,94.553
ANTENNA: ANT300.0 C322.2 L303.2 | length 2
  Top Layer w0.405: C322.2 28.899,115.191 L303.2@28.899,114.576 ; C322.2@28.9,115.215 28.9,116.625
BAT+: C204.2 IC201.2 J200.1 | length 0.1
  Top Layer w0.254: C204.2@36.45,85.865 C204.2
BOOT0: C302.2 IC300.4 R301.1 SW300.2 | length 47.7
  Top Layer w0.152: SW300.2 SW300.2@27.975,83.15 ; R301.1 SW300.2@27.975,83.15 ; v1(30.1,88.621) 30.075,88.596 30.075,87.325 28.424,85.674 28.424,83.599 SW300.2@27.975,83.15 ; v1(36.075,113.725) 36.075,113.625 38.275,111.425 38.275,110.724 38.679,110.32 38.693,110.32 38.706,110.307 38.783,110.307 38.967,110.124 C302.2 38.967,109.408 39.075,109.3 IC300.4
  Bottom Layer w0.152: v1(30.1,88.621) 29.925,88.796 29.925,97.725 35.283,103.083 35.283,104.267 33.973,105.577 32.916,105.577 31.075,107.418 31.075,111.975 32.825,113.725 v1(36.075,113.725)
BS: J400.8 R400.2 R401.2 | length 2.5
  Top Layer w0.152: R401.2@35.35,61.525 R400.2@36.375,61.525 ; R400.2 36.775,61.55 36.9,61.675 J400.8
CC1: J300.A5 R302.1 | length 1.3
  Top Layer w0.152: J300.A5 32.503,93.203 33.723,93.203 R302.1@33.75,93.175
CC2: J300.B5 R303.1 | length 1.2
  Top Layer w0.152: J300.B5 32.549,90.304 R303.1@33.675,90.304
EN: IC200.4 IC202.1 R204.2 | length 6.3
  Top Layer w0.152: v1(38.4,92.6) IC200.4 ; R204.2@39.65,94.575 40.825,94.575 IC202.1 ; R204.2 v1(39.65,95.5)
  Bottom Layer w0.152: v1(38.4,92.6) 39.65,93.85 v1(39.65,95.5)
GDR: GDR.1 J400.2 Q400.1 R402.1 | length 9.8
  Top Layer w0.152: GDR.1 35.05,58.225 ; R402.1 33.86,62.492 Q400.1@33.971,62.602 ; R402.1@33.875,61.375 33.876,61.374 33.876,59.399 35.05,58.225 ; J400.2 36.925,58.675 36.475,58.225 35.05,58.225
GND: C200.1 C201.1 C202.1 C203.1 C204.1 C205.1 C300.1 C301.1 C302.1 C303.1 C304.1 C305.1 C306.1 C307.1 C308.1 C309.1 C310.1 C311.1 C312.1 C313.1 C314.1 C315.1 C316.1 C317.1 C318.1 C319.1 C320.1 C321.1 C322.1 C400.2 C401.2 C402.1 C403.1 C404.1 C406.1 C407.1 C408.1 C409.1 C410.1 C411.1 D300.1 D301.1 D401.1 FL300.2 FL300.4 GND.1 IC200.3 IC200.7 IC201.5 IC201.11 IC202.3 IC300.22 IC300.32 IC300.49 J200.2 J200.MP1 J200.MP2 J300.1 J300.2 J300.3 J300.4 J300.A1-B12 J300.B1-A12 J400.17 R200.1 R201.1 R202.1 R203.1 R301.2 R302.2 R303.2 R400.1 R402.2 R403.2 SW301.1 U300.4 Y301.2 Y301.4 | length 33.8
  Top Layer w0.152: 27.4,115.2 C322.1 ; v1@27.42,108.11 v1@27.421,108.109 ; v1@27.425,110.475 v1@27.491,110.409 ; C319.1@27.916,108.109 C319.1 ; C320.1@27.926,110.409 C320.1 ; C321.1@28.063,112.993 28.07,113 C321.1 ; v1@31.45,100.975 32.31,100.975 C316.1 ; C318.1 C318.1@31.6,107.785 ; C318.1@31.675,107.685 31.675,107.67 31.784,107.561 31.926,107.561 32.291,107.196 32.291,107.149 C317.1@32.475,106.965 ; C311.1 32.335,101.865 C312.1 ; R403.2@33.263,65.063 R403.2 ; IC300.22@34.316,103.766 IC300.22 36.075,103.825 IC300.49 38.575,104.825 IC300.32 ; C202.1 34.166,87.334 33.975,87.334 33.675,87.634 33.675,88.282 33.993,88.6 34.845,88.6 35.125,88.32 C203.1 36.5,88.3 IC201.11 ; C308.1 35.635,110.925 C307.1 ; IC200.3 36.926,93.475 37.35,93.899 37.35,95.116 36.969,95.497 36.969,95.516 C200.1@36.785,95.7 ; 36.65,91.1 39.1,91.1 v1(39.15,91.05) ; C200.1 C201.1 ; C309.1 37.372,110.752 37.454,110.67 C309.1@37.556,110.67 ; C315.1 38.595,112.125 38.779,111.941 38.779,111.871 39.031,111.619 C302.1@39.031,110.944 ; C305.1@39.644,100.317 C305.1@39.654,100.307 ; C305.1@39.685,100.325 40.525,100.325 C303.1@40.55,100.3 ; v1(40.386,91.44) 40.85,91.904 IC202.3 ; C314.1 C314.1@40.975,112.1 ; C304.1 v1(42.3,110.125) 42.3,109.315 C301.1@42.2,109.215 ; C300.1 42.4,106.675 43.442,107.717 v1(43.465,107.717)
  other v1: 27.432,56.388 28.956,56.388 32.004,56.388 35.052,56.388 42.672,56.388 26.67,57.912 28.194,57.912 29.718,57.912 40.386,57.912 41.91,57.912 43.434,57.912 32.575,58.8 27.432,59.436 28.956,59.436 39.624,59.436 41.148,59.436 42.672,59.436 40.386,60.96 41.91,60.96 43.434,60.96 42.672,62.484 43.434,64.008 42.672,65.532 43.434,67.056 33.9,67.325 27.432,68.58 28.956,68.58 30.48,68.58 32.004,68.58 42.672,68.58 43.434,70.104 42.672,71.628 29.718,73.152 32.766,73.152 34.29,73.152 43.434,73.152 30.48,74.676 33.528,74.676 35.052,74.676 36.576,74.676 34.29,76.2 35.814,76.2 37.338,76.2 42.672,77.724 26.67,79.248 28.194,79.248 29.718,79.248 31.242,79.248 43.434,79.248 27.432,80.772 28.956,80.772 30.48,80.772 32.004,80.772 42.672,80.772 29.718,82.296 37.338,82.296 30.48,83.82 42.672,83.82 43.434,85.344 29.85,85.85 26.85,85.9 39.624,86.868 38.862,88.392 40.386,88.392 39.624,89.916 41.148,89.916 41.91,91.44 41.148,96.012 31.6,97.7 34.275,97.775 28.194,100.584 31.464,100.974 26.3,101.2 27.432,102.108 32.019,103.605 26.67,103.632 28.194,103.632 29.718,103.632 31.055,104.152 30.272,104.935 32.539,105.045 27.432,105.156 31.604,105.639 29.489,105.719 30.82,106.422 28.705,106.502 27.875,107.15 30.037,107.206 27.318,108.197 29.661,108.248 28.025,109.075 29.7,109.5 27.3,110.25 29.725,110.75 28,111.35 29.725,111.975 27.325,112.45 29.725,113.225 27.325,113.525 31,113.85 39.624,114.3 28.025,114.4 29.725,114.45 32.475,114.6 26.025,115.625 27.3,115.625 29.725,115.65 31.05,115.65 32.475,115.65 33.8,115.65 35.25,115.65 36.7,115.65 38.2,115.65 39.675,115.65 41.1,115.65 42.45,115.65 43.8,115.65
NetC205_2: C205.2 IC202.5 | length 1.2
  Top Layer w0.152: IC202.5 43.39,94.64 C205.2
NetC310_2: C310.2 IC300.31 L301.2 | length 4
  Top Layer w0.254: L301.2@35.859,99.252 36.226,99.619 36.226,100.161 36.762,100.697 36.762,100.717 36.895,100.85 C310.2 37.048,100.983 37.317,100.983 38.052,101.718 38.052,102.102 IC300.31
NetC320_2: C320.2 FL300.1 L302.2 | length 1.3
  Top Layer w0.405: L302.2@28.883,109.553 28.883,110.217 C320.2 28.883,110.232 FL300.1@28.883,110.86
NetC321_2: C321.2 FL300.3 L303.1 | length 1.2
  Top Layer w0.405: FL300.3@28.899,112.344 L303.1@28.899,113.582
NetC405_1: C405.1 D402.2 L400.2 Q400.3
NetC405_2: C405.2 D400.1 D401.2
NetD300_2: D300.2 R300.1 | length 1.3
  Top Layer w0.152: R300.1 26.25,99.025 D300.2
NetD301_2: D301.2 R305.2 | length 1.1
  Top Layer w0.152: D301.2@43.4,113.3 D301.2@43.475,113.225 ; R305.2 D301.2
NetIC201_4: IC201.4 R201.2 | length 1.2
  Top Layer w0.152: IC201.4 37.274,86.826 37.274,85.851 R201.2
NetIC201_6: IC201.6 R203.2 | length 1.3
  Top Layer w0.152: IC201.6 37.65,89.7 38.125,90.175 R203.2
NetIC201_7: IC201.7 R202.2 | length 1.1
  Top Layer w0.152: IC201.7 R202.2
NetIC201_8: IC201.8 R200.2 | length 1.3
  Top Layer w0.152: R200.2 36.375,90.175 36.549,90.001 36.549,89.976 36.85,89.675 IC201.8
NetIC300_13: IC300.13 J400.12 | length 58.2
  Top Layer w0.152: IC300.13 34.375,109.637 34.711,109.973 v1(34.711,110.048) ; J400.12 37.737,63.662 39.586,63.662 40.074,64.15 v1(40.1,64.15)
  Bottom Layer w0.152: v1(34.711,110.048) 34.716,110.044 39.356,110.044 43.625,105.775 43.625,88.2 40.125,84.7 40.125,64.175 v1(40.1,64.15)
NetIC300_14: IC300.14 J400.13 | length 57.9
  Top Layer w0.152: v1(33.701,109.505) 33.747,109.459 33.747,108.091 33.939,107.899 34.301,107.899 IC300.14 ; J400.13 38.837,64.175 38.854,64.192 ; 38.855,64.192 38.878,64.215 38.88,64.215 39.365,64.7 v1(39.45,64.7)
  Bottom Layer w0.152: v1(33.701,109.505) 39.395,109.505 43.35,105.55 43.35,88.4 39.45,84.5 v1(39.45,64.7)
NetIC300_15: IC300.15 J400.11 | length 62.9
  Top Layer w0.152: v1(33.75,110.548) 33.75,110.469 33.153,109.873 33.153,108.272 34.026,107.399 34.1,107.325 IC300.15 ; J400.11 v1(40.05,63.175)
  Bottom Layer w0.152: v1(33.75,110.548) 39.377,110.548 43.875,106.05 43.875,88.025 40.825,84.975 40.825,63.95 v1(40.05,63.175)
NetIC300_16: IC300.16 J400.14 | length 60.5
  Top Layer w0.152: v1(32.775,110.175) 32.731,110.131 32.731,108.107 33.939,106.899 34.301,106.899 IC300.16 ; J400.14 37.735,64.685 38.604,64.685 38.716,64.798 38.716,65.053 v1(38.802,65.139)
  Bottom Layer w0.152: v1(32.775,110.175) 32.73,110.13 32.73,109.369 35.263,106.836 41.539,106.836 43.075,105.3 43.075,88.49 38.875,84.29 38.875,65.212 v1(38.802,65.139)
NetIC300_17: IC300.17 J400.10 | length 67.7
  Top Layer w0.152: v1(32.178,109.117) 32.178,108.172 33.951,106.399 34.301,106.399 IC300.17 ; J400.10 39.595,62.675 40.02,62.25 v1(40.025,62.25)
  Bottom Layer w0.152: v1(32.178,109.117) 32.1,109.195 32.1,110.255 32.945,111.1 39.375,111.1 44.124,106.351 44.124,87.849 41.475,85.2 41.475,63.7 v1(40.025,62.25)
NetIC300_18: IC300.18 J400.9 | length 58.1
  Top Layer w0.152: v1(33.2,106.4) 33.775,105.825 IC300.18 ; J400.9 38.579,62.175 38.754,62 v1(38.875,62)
  Bottom Layer w0.152: v1(33.2,106.4) 33.224,106.376 41.449,106.376 42.8,105.025 42.8,88.61 38.144,83.954 38.144,62.731 v1(38.875,62)
NetIC300_33: IC300.33 L300.1 | length 1.4
  Top Layer w0.254: L300.1@38.623,100.873 39.075,101.325 IC300.33
NetL300_2: L300.2 L301.1 | length 1.7
  Top Layer w0.254: L300.2 37.725,100.525 37.773,100.477 37.923,100.477 38.128,100.272 L301.1@38.128,99.246
NRST: C309.2 IC300.7 R304.2 SW301.2 | length 46.7
  Top Layer w0.152: v1(31.25,88.775) 31.155,88.775 30.775,88.395 30.775,84.575 32.1,83.25 SW301.2 32.3,83.05 R304.2@33.625,83.05 ; v1(33.8,113.075) 35.975,113.075 37.835,111.215 37.835,110.49 37.643,110.298 37.556,110.298 37.372,110.114 C309.2 ; C309.2@37.188,110.287 37.188,110.252 C309.2@37.366,110.074 ; C309.2@37.372,110.08 37.47,109.982 37.47,109.463 37.501,109.432 37.501,109.099 IC300.7
  Bottom Layer w0.152: v1(31.25,88.775) 31.25,88.829 30.25,89.829 30.25,97.5 35.6,102.85 35.6,104.375 34.119,105.856 33.032,105.856 31.525,107.363 31.525,111.7 32.9,113.075 v1(33.8,113.075)
OSC32k_IN: C314.2 IC300.2 Y300.1 | length 5
  Top Layer w0.152: IC300.2 40.075,111.3 40.075,112.03 C314.2 ; C314.2@40.245,112.18 40.351,112.286 40.351,112.651 41,113.3 Y300.1
OSC32k_OUT: C315.2 IC300.3 Y300.2 | length 5.1
  Top Layer w0.152: Y300.2 38.5,113.3 39.136,112.664 39.136,112.309 39.32,112.125 39.34,112.125 39.51,111.955 39.51,109.09 IC300.3
OSC32M_IN: C313.2 IC300.25 Y301.3 | length 4.1
  Top Layer w0.152: Y301.3 33.475,98.775 33.774,99.074 34.036,99.336 34.166,99.336 34.34,99.51 C313.2@34.34,99.59 ; C313.2@34.33,99.63 35.075,100.375 IC300.25
OSC32M_OUT: C316.2 IC300.24 Y301.1 | length 4.1
  Top Layer w0.152: Y301.1 32.425,100.125 32.911,100.611 32.911,100.766 33.115,100.97 C316.2@33.155,100.97 ; C316.2 33.664,100.95 34.075,101.361 34.075,102.751 34.149,102.825 IC300.24
PREVGH: C411.2 D402.1 J400.21 PREVGH.1 | length 13.9
  Top Layer w0.254: PREVGH.1@31.4,72.525 31.4,71.613 31.711,71.303 31.711,70.944 32.041,70.613 D402.1 ; D402.1@32.375,70.638 32.517,70.78 C411.2@33.95,70.78 ; C411.2@33.95,70.82 33.95,70.8 33.987,70.837 33.987,71.312 34.925,72.25 37.35,72.25 38.85,70.75 38.85,68.324 38.701,68.175 J400.21
PREVGL: C408.2 D400.2 J400.23 PREVGL.1 | length 12.6
  Top Layer w0.254: PREVGL.1 28.213,72.575 29.642,71.146 29.642,70.994 29.973,70.663 29.973,70.568 30.258,70.283 30.353,70.283 31.352,69.284 35.634,69.284 C408.2@36.03,69.68 ; C408.2 36.223,69.717 36.426,69.717 36.945,69.198 37.702,69.198 J400.23
RESE: J400.3 Q400.2 R403.1 RESE.1 | length 15.6
  Top Layer w0.152: Q400.2@34.05,63.85 34.075,63.825 v1(35.075,63.825) ; Q400.2@34.094,63.85 34.3,64.056 R403.1@34.3,64.925 ; RESE.1@35.925,56.475 36.15,56.7 37.875,56.7 38.775,57.6 38.775,58.85 38.497,59.128 37.772,59.128 J400.3 36.896,59.175 36.557,58.836 36.136,58.836 v1(36.05,58.75)
  Top Layer w0.254: R403.1@34.134,64.985 R403.1
  Bottom Layer w0.152: v1(35.075,63.825) 36.371,62.529 36.371,59.176 36.05,58.855 v1(36.05,58.75)
RF1: C319.2 IC300.21 L302.1 | length 8
  Top Layer w0.3: 33.7,104.325 IC300.21
  Top Layer w0.405: C319.2 28.88,108.577 L302.1@28.886,108.584 ; C319.2@28.9,107.925 28.9,107.325 31.9,104.325 33.7,104.325
SYS: C201.2 C202.2 IC200.6 IC201.1 IC202.2 R204.1 | length 18.8
  Top Layer w0.152: IC202.2@40.825,93.675 IC202.2
  Top Layer w0.254: v1(34.912,86.241) 34.912,86.312 35.149,86.55 C202.2@35.149,87.125 ; C202.2@35.145,87.125 35.996,87.125 36.05,87.071 IC201.1 ; C201.2 38.395,95.695 38.395,94.78 38.448,94.727 38.682,94.727 38.855,94.554 39.004,94.405 39.499,93.91 39.499,93.848 39.622,93.725 R204.1@39.647,93.725 ; C201.2@38.41,95.7 38.844,96.134 39.109,96.134 v1(39.175,96.2) ; R204.1@39.65,93.675 39.663,93.662 40.837,93.662 IC202.2
  Bottom Layer w0.254: v1(34.912,86.241) 37.55,88.879 37.55,94.75 38.242,95.442 38.417,95.442 v1(39.175,96.2)
USB_D_N: IC300.37 J300.A7 J300.B7 U300.2 U300.5 | length 21.1
  Top Layer w0.127: J300.B7@32.465,92.74 J300.B7
  Top Layer w0.187: J300.A7 32.532,91.787 33.068,91.787 33.27,91.989 33.27,92.471 33.068,92.673 32.532,92.673 J300.B7 ; 33.068,91.694 33.401,91.694 34.361,92.653 34.361,95.911 35.875,97.425 U300.2 ; U300.2@40.175,97.425 40.325,97.275 40.764,97.275 41.414,97.925 41.865,97.925 41.922,97.982 41.922,102.677 41.796,102.803 41.297,102.803 IC300.37
USB_D_P: IC300.38 J300.A6 J300.B6 U300.3 | length 23
  Top Layer w0.127: J300.A6 J300.A6@32.478,92.227
  Top Layer w0.187: J300.A6 32.418,92.173 31.882,92.173 31.68,91.971 31.68,91.489 31.882,91.287 32.418,91.287 J300.B6 33.382,91.23 34.675,92.523 34.675,95.781 36.005,97.111 39.902,97.111 40.018,96.995 40.018,96.982 40.075,96.925 U300.3 ; U300.3@40.15,96.95 40.884,96.95 41.545,97.611 42.105,97.611 42.245,97.751 42.245,97.782 42.236,97.792 42.236,102.807 41.926,103.117 41.758,103.117 41.55,103.325 IC300.38
USR_LED: IC300.46 R305.1 | length 5.6
  Top Layer w0.152: IC300.46 42.1,107.325 43.225,108.45 v1(43.225,108.475) ; v1@43.475,110.53 R305.1
  Bottom Layer w0.152: v1(43.225,108.475) 43.225,109.337 43.125,109.437 43.125,110.177 43.475,110.527 v1(43.475,110.575)
VCOM: C409.2 J400.24 VCOM.1 | length 6.2
  Top Layer w0.254: VCOM.1 36,73.175 36.025,73.15 36.988,73.15 v1(37.013,73.125) ; C409.2 36.103,70.938 36.103,71.687 v1(36.14,71.725) ; C409.2@36.074,70.9 36.207,70.767 36.274,70.767 37.202,69.839 37.202,69.698 37.225,69.675 J400.24
  Bottom Layer w0.254: 36.155,71.331 36.155,72.205 v1@36.862,72.913
VDD: C403.2 J400.18 | length 1.9
  Top Layer w0.254: C403.2@36.05,66.02 36.113,66.083 36.433,66.083 37.002,66.652 37.702,66.652 J400.18
VGH: C401.1 J400.5 | length 1.8
  Top Layer w0.254: C401.1@36.065,60.575 36.475,60.575 36.852,60.198 37.702,60.198 J400.5
VGL: C400.1 J400.4 | length 1.7
  Top Layer w0.254: C400.1@36.015,59.675 J400.4
VPP: C404.2 J400.19 | length 1.8
  Top Layer w0.254: C404.2 36.65,66.9 36.902,67.152 37.702,67.152 J400.19
VSH: C406.2 J400.20 | length 1.7
  Top Layer w0.254: C406.2@36.075,67.82 37.08,67.82 37.225,67.675 J400.20
VSL: C407.2 J400.22 | length 1.7
  Top Layer w0.254: C407.2@36.065,68.675 J400.22
pads on no net: IC200.2 IC200.5 IC201.3 IC201.9 IC202.4 IC300.5 IC300.6 IC300.9 IC300.10 IC300.11 IC300.12 IC300.19 IC300.26 IC300.27 IC300.28 IC300.29 IC300.30 IC300.36 IC300.39 IC300.41 IC300.42 IC300.43 IC300.44 IC300.45 IC300.47 J300.A8 J300.B8 J400.1 J400.6 J400.7 J400.25 J400.26

## Polygon pours and split planes (outlines as drawn)
GND on Top Layer "GND_L01_P016" (solid, pour order 16): 25.375,116.024 44.375,116.024 44.375,55.034 44.359,55.049 25.375,55.049
+5V on Top Layer "Top Layer-+5V" (solid, pour order 7): 33.015,89.275 33.977,88.675 36.175,88.675 36.175,89.491 35.725,89.875 34.176,89.9 33.05,89.899 33.05,94.709 31.766,94.709 29.067,98.005 25.8,98.001 25.8,89.275
NetC405_2 on Top Layer "NETC405_2_L01_P000" (solid, pour order 0): 26.686,67.791 30.375,67.791 30.375,67.6 32.025,65.95 32.025,65.3 31.53,65.3 29.955,66.875 26.686,66.875